# EAGLE board control_boardv7 (EAGLE 9.5.2)
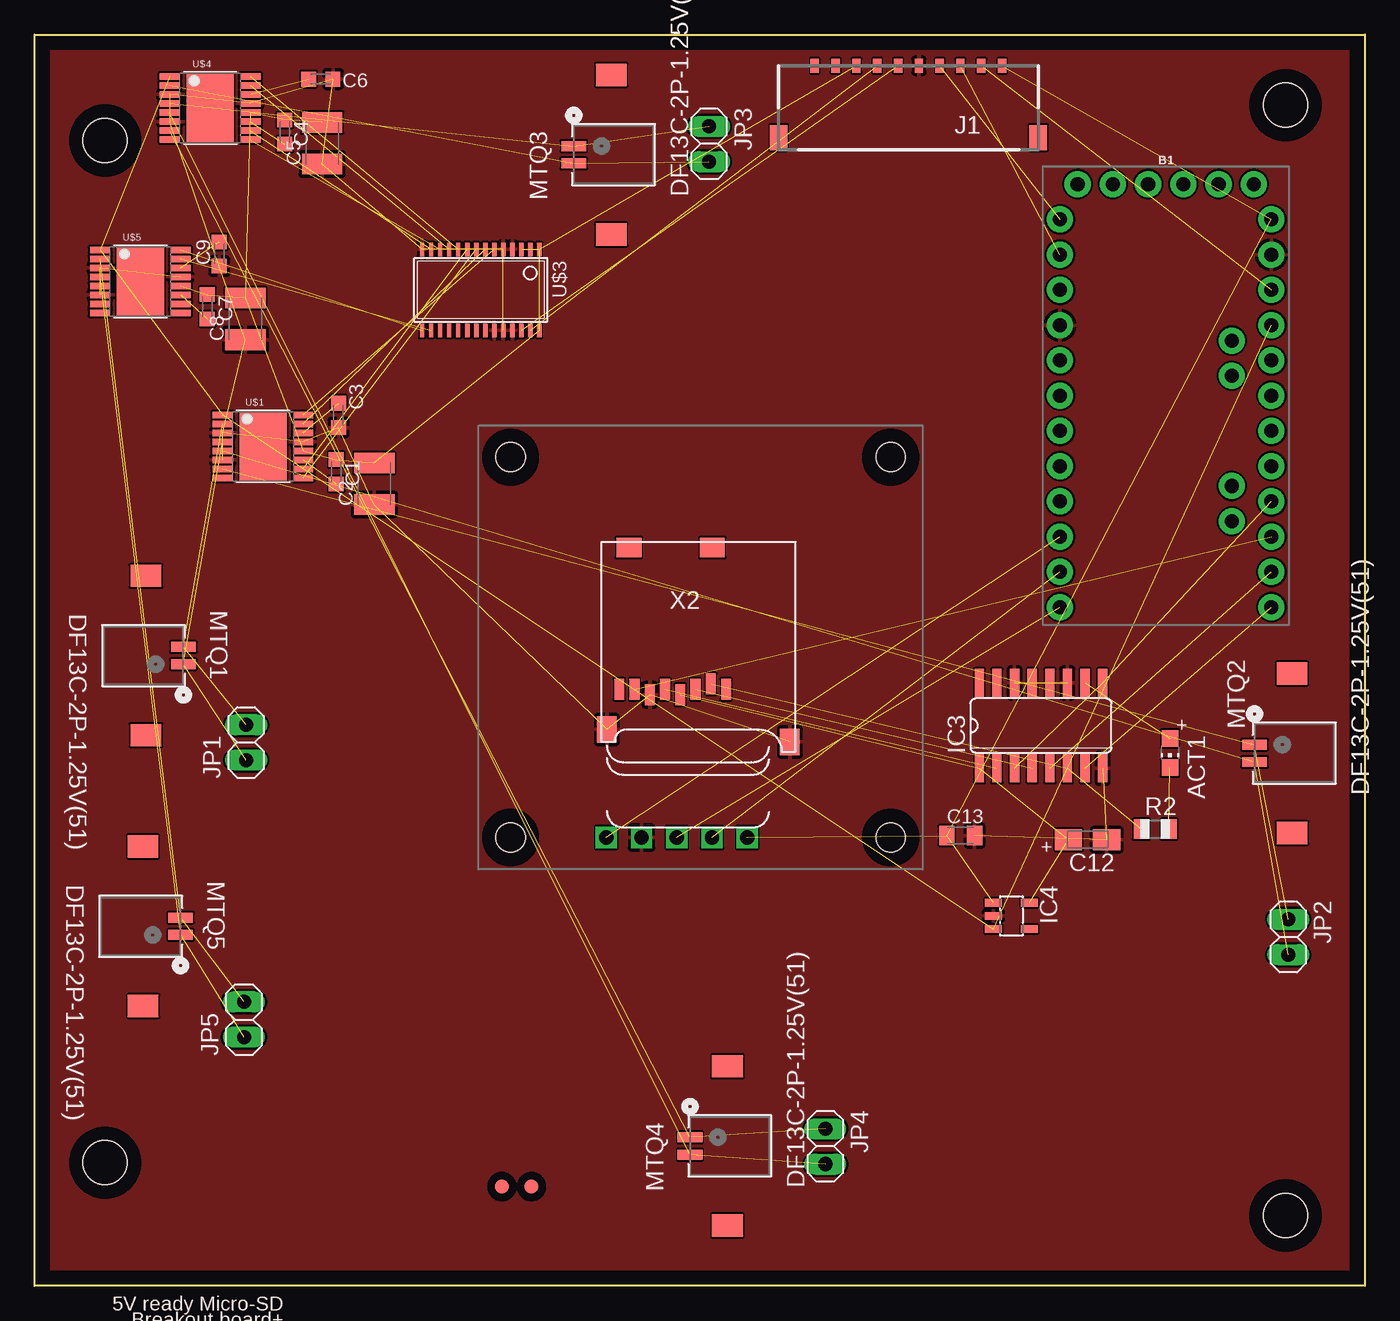
[diagram p0: board, top side]
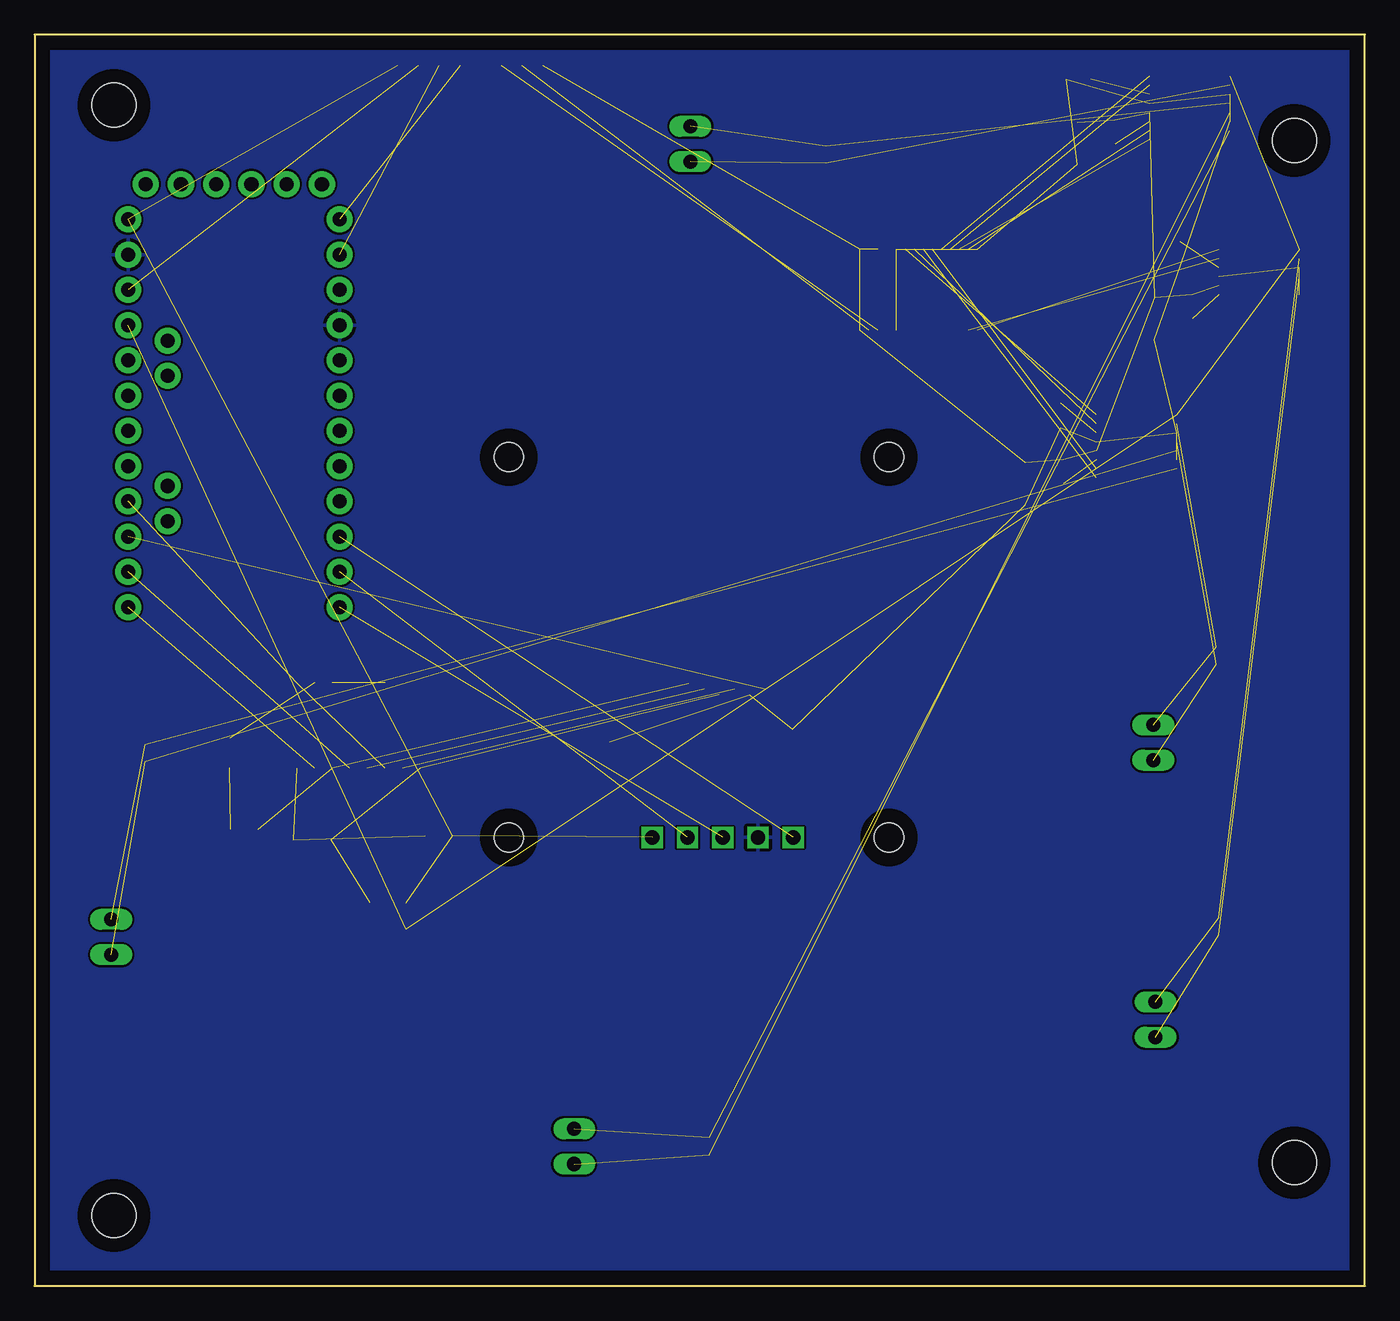
[diagram p1: board, bottom side, seen from below]

Size 95.89 x 90.17 mm. Coordinates in mm from the lower left corner, seen from the top.
Outline: 0,80 0,0
Outline: 0,0 0,90.17 95.89,90.17 95.89,0 0,0
Copper layers (1*16): Top 0.035mm / dielectric 1.5mm / Bottom 0.035mm
Design rules "default": minimum track width 6mil, minimum drill 0.35mm, track to track 6mil, track to pad 6mil, pad to pad 6mil, via to via 6mil, smd to smd 6mil, copper to edge 40mil, drill to drill 6mil, minimum pad ring 10mil, minimum via ring 8mil, stop-mask expansion 4mil, vias tented up to drill 0mil, thermal gap 10mil
Net classes: 0 default: width 0.152 mm; 1 New Class: width 0.457 mm; 2 MTQs: width 0.305 mm
Holes 3.17 mm at 5.08,82.55 5.08,8.89 90.17,5.08 90.17,85.09

## Footprints (pad centres in the part's own frame; a part is rotated, then mirrored left to right if it is on the bottom)
CHIP-LED0805 = smd 1.2 x 1.2: A 0,-1.05; C 0,1.05
ARDUINO_PRO_MINI = drill 1.016 pad 1.88: 1 -7.62,12.7; 2 -7.62,10.16; 3 -7.62,7.62; 4 -7.62,5.08; 5 -7.62,2.54; 6 -7.62,0; 7 -7.62,-2.54; 8 -7.62,-5.08; 9 -7.62,-7.62; 10 -7.62,-10.16; 11 -7.62,-12.7; 12 -7.62,-15.24; 13 7.62,-15.24; 14 7.62,-12.7; 15 7.62,-10.16; 16 7.62,-7.62; 17 7.62,-5.08; 18 7.62,-2.54; 19 7.62,0; 20 7.62,2.54; 21 7.62,5.08; 22 7.62,7.62; 23 7.62,10.16; 24 7.62,12.7; A4 4.763,1.429; A5 4.763,3.969; A6 4.763,-9.049; A7 4.763,-6.509; BLK -6.35,15.24; GND -3.81,15.24; GRN 6.35,15.24; RXI 1.27,15.24; TXO 3.81,15.24; VCC -1.27,15.24
C0603K = smd 1.05 x 1.08: 1 -0.875,0; 2 0.875,0
C1210K = smd 1.5 x 2.9: 1 -1.5,0; 2 1.5,0
A/3216-18R = smd 1.95 x 1.5: + 1.375,0; - -1.375,0
C0805K = smd 1.1 x 1.4: 1 -1,0; 2 1,0
SO16 = smd 0.66 x 2.032: 1 -4.445,-3.073; 2 -3.175,-3.073; 3 -1.905,-3.073; 4 -0.635,-3.073; 5 0.635,-3.073; 6 1.905,-3.073; 7 3.175,-3.073; 8 4.445,-3.073; 9 4.445,3.073; 10 3.175,3.073; 11 1.905,3.073; 12 0.635,3.073; 13 -0.635,3.073; 14 -1.905,3.073; 15 -3.175,3.073; 16 -4.445,3.073
SOT23-5L = smd 0.55 x 1.2: 1 -0.95,-1.3; 2 0,-1.3; 3 0.95,-1.3; 4 0.95,1.3; 5 -0.95,1.3
504050-1091 = smd 0.6 x 1: 1 -13.5,0; 2 -12,0; 3 -10.5,0; 4 -9,0; 5 -7.5,0; 6 -6,0; 7 -4.5,0; 8 -3,0; 9 -1.5,0; 10 0,0 | smd 1.25 x 1.8: 11 2.605,5.19; 12 -16.105,5.19
1X02 = drill 1.016 long: 1 -1.27,0; 2 1.27,0
CON2_1X2_U_DF13 = smd 0.711 x 1.778: 1 0,0; 2 -1.25,0 | smd 1.6 x 2.21: 3 -6.365,-2.7; 5 5.115,-2.7
R0805 = smd 1.1 x 1.4: 1 -1,0; 2 1,0
HTSSOP16 = smd 1.5 x 0.45: P1 -2.9,2.275; P2 -2.9,1.625; P3 -2.9,0.975; P4 -2.9,0.325; P5 -2.9,-0.325; P6 -2.9,-0.975; P7 -2.9,-1.625; P8 -2.9,-2.275; P9 2.9,-2.275; P10 2.9,-1.625; P11 2.9,-0.975; P12 2.9,-0.325; P13 2.9,0.325; P14 2.9,0.975; P15 2.9,1.625; P16 2.9,2.275 | smd 3.4 x 5: PAD 0,0
UCAM-III = drill 1.02 square: 1 19.36,2.3; 2 16.82,2.3; 3 14.28,2.3; 4 11.74,2.3; 5 9.2,2.3 | hole 2.1: 2.3,2.3; 29.7,2.3; 29.7,29.7; 2.3,29.7
TSSOP28 = smd 0.305 x 0.991: 1 -4.225,-2.918; 2 -3.575,-2.918; 3 -2.925,-2.918; 4 -2.275,-2.918; 5 -1.625,-2.918; 6 -0.975,-2.918; 7 -0.325,-2.918; 8 0.325,-2.918; 9 0.975,-2.918; 10 1.625,-2.918; 11 2.275,-2.918; 12 2.925,-2.918; 13 3.575,-2.918; 14 4.225,-2.918; 15 4.225,2.918; 16 3.575,2.918; 17 2.925,2.918; 18 2.275,2.918; 19 1.625,2.918; 20 0.975,2.918; 21 0.325,2.918; 22 -0.325,2.918; 23 -0.975,2.918; 24 -1.625,2.918; 25 -2.275,2.918; 26 -2.925,2.918; 27 -3.575,2.918; 28 -4.225,2.918
FIDUCIAL_1MM = smd 1 x 1: 1 0,0
MICROSD = smd 0.7 x 1.5: 1 9,-10.64; 2 7.9,-10.24; 3 6.8,-10.64; 4 5.7,-11.04; 5 4.6,-10.64; 6 3.5,-11.04; 7 2.4,-10.64; 8 1.3,-10.64 | smd 1.8 x 1.4: CD1 2,-0.44; CD2 8,-0.44 | smd 1.4 x 1.9: MT1 0.4,-13.54; MT2 13.6,-14.44

## Placement (x,y rotation side)
ACT1  RED  [CHIP-LED0805]  81.84,38.4 180 top
B1  ARDUINO_PRO_MINI  [ARDUINO_PRO_MINI]  81.53,64.16 0 top
C1  0.01uF  [C0603K]  21.74,58.67 270 top
C2  10uF  [C1210K]  24.49,57.81 90 top
C3  2.2uF  [C0603K]  21.89,62.74 90 top
C4  0.01uF  [C0603K]  18.03,83.16 270 top
C5  10uF  [C1210K]  20.73,82.35 90 top
C6  2.2uF  [C0603K]  20.62,86.97 180 top
C7  0.01uF  [C0603K]  12.45,70.56 270 top
C8  10uF  [C1210K]  15.19,69.7 90 top
C9  2.2uF  [C0603K]  13.31,74.37 90 top
C12  10uF/10V  [A/3216-18R]  75.9,32.16 180 top
C13  0.1uF  [C0805K]  66.75,32.46 0 top
IC3  4050D  [SO16]  72.54,40.39 0 top
IC4  LP298XS  [SOT23-5L]  70.41,26.67 270 top
J1  504050-1091  [504050-1091]  56.24,87.93 180 top
JP1  [1X02]  15.24,39.17 90 top
JP2  [1X02]  90.37,25.15 270 top
JP3  [1X02]  48.62,82.3 270 top
JP4  [1X02]  57,10.06 270 top
JP5  [1X02]  15.09,19.2 90 top
MTQ1  DF13C-2P-1.25V(51)  [CON2_1X2_U_DF13]  10.72,44.81 270 top
MTQ2  DF13C-2P-1.25V(51)  [CON2_1X2_U_DF13]  87.93,39.01 90 top
MTQ3  DF13C-2P-1.25V(51)  [CON2_1X2_U_DF13]  38.86,82.14 90 top
MTQ4  DF13C-2P-1.25V(51)  [CON2_1X2_U_DF13]  47.24,10.72 90 top
MTQ5  DF13C-2P-1.25V(51)  [CON2_1X2_U_DF13]  10.52,25.3 270 top
R2  1K  [R0805]  80.77,32.92 0 top
U$1  DRV8833PWP  [HTSSOP16]  16.46,60.5 0 top
U$2  UCAM-III  [UCAM-III]  32,30.02 0 top
U$3  PCA9685PW  [TSSOP28]  32.16,71.78 180 top
U$4  DRV8833PWP  [HTSSOP16]  12.65,84.89 0 top
U$5  DRV8833PWP  [HTSSOP16]  7.62,72.39 0 top
U$6  FIDUCIAL  [FIDUCIAL_1MM]  33.68,7.16 0 top
U$7  FIDUCIAL  [FIDUCIAL_1MM]  35.81,7.16 0 top
X2  MICROSD  [MICROSD]  40.84,53.64 0 top

## Library data of the parts
ACT1 C12 C13 IC4 R2 U$6 U$7 X2 = adafruit
B1 = SparkFun-Boards
C1-C9 = rcl; SPICEPREFIX: C
IC3 = 40xx
J1 = molex_10pin; DESCRIPTION: Pico-Lock SMT Wire-to-Board Header 10way Molex 504050 Series, 1.5mm Pitch 10 Way 1 Row Right Angle PCB Header, SMT Termination, 3A; HEIGHT: mm; MANUFACTURER_NAME: Molex; MANUFACTURER_PART_NUMBER: 504050-1091; MOUSER_PART_NUMBER: 538-504050-1091; MOUSER_PRICE-STOCK: https://www.mouser.com/Search/Refine.aspx?Keyword=538-504050-1091
JP1-JP5 = pinhead
MTQ1-MTQ5 = myparts; BUILT_BY: EMA_UL_Team; MANUFACTURER_PART_NUMBER: DF13C-2P-1.25V(51); VENDOR: Hirose
U$1-U$5 = myparts

## Nets
5V_1 [New Class]: C1.1 C2.2 C4.1 C5.2 C7.1 C8.2 J1.8 U$1.P12 U$3.1 U$3.2 U$3.3 U$3.28 U$4.P12 U$5.P12
5V_2 [New Class]: B1.24 C13.1 IC4.1 J1.1 U$2.1
+3V3: C12.+ IC3.1 IC4.5 X2.4
CD: X2.CD1
CLK: B1.16 IC3.3 IC3.9
CS: B1.13 IC3.7
DI: B1.14 IC3.5
DO: B1.15 X2.7
GND [New Class]: B1.4 B1.23 C2.1 C3.1 C5.1 C6.1 C8.1 C9.1 C12.- C13.2 IC3.8 IC3.11 IC3.14 IC4.2 J1.5 U$1.P3 U$1.P6 U$1.P13 U$2.4 U$3.4 U$3.5 U$3.14 U$3.23 U$3.24 U$3.25 U$4.P3 U$4.P6 U$4.P13 U$5.P3 U$5.P6 U$5.P13 X2.6 X2.MT1 X2.MT2
MTQ1_A: U$1.P16 U$3.6
MTQ1_B: U$1.P15 U$3.7
MTQ2_A: U$1.P9 U$3.8
MTQ2_B: U$1.P10 U$3.9
MTQ3_A: U$3.10 U$4.P16
MTQ3_B: U$3.11 U$4.P15
MTQ4_A: U$3.12 U$4.P9
MTQ4_B: U$3.13 U$4.P10
MTQ5_A: U$3.15 U$5.P16
MTQ5_B: U$3.16 U$5.P15
N$1 [MTQs]: JP3.2 MTQ3.2 U$4.P2
N$2: C3.2 U$1.P14
N$3 [MTQs]: JP1.1 MTQ1.1 U$1.P4
N$4 [MTQs]: JP1.2 MTQ1.2 U$1.P2
N$5 [MTQs]: JP2.1 MTQ2.1 U$1.P7
N$6 [MTQs]: JP2.2 MTQ2.2 U$1.P5
N$7: C1.2 U$1.P11
N$8 [MTQs]: JP4.1 MTQ4.1 U$4.P7
N$9 [MTQs]: JP4.2 MTQ4.2 U$4.P5
N$10: C6.2 U$4.P14
N$11: C4.2 U$4.P11
N$12 [MTQs]: JP3.1 MTQ3.1 U$4.P4
N$13 [MTQs]: JP5.2 MTQ5.2 U$5.P2
N$14 [New Class]: U$1.PAD
N$15 [New Class]: U$4.PAD
N$16: C9.2 U$5.P14
N$17: C7.2 U$5.P11
N$18 [MTQs]: JP5.1 MTQ5.1 U$5.P4
N$19 [New Class]: U$5.PAD
N$22: ACT1.A IC3.10
N$23: IC3.2 X2.5
N$24: IC3.6 R2.1 X2.2
N$25: ACT1.C R2.2
N$26: IC3.4 X2.3
N$27: B1.10 U$2.5
RST: B1.22 J1.2
RX: B1.12 U$2.3
RXI: B1.2 J1.3
SCL: J1.6 U$3.26
SDA: J1.7 U$3.27
TX: B1.11 U$2.2
TXO: B1.1 J1.4
VCC: B1.21 IC4.3 U$1.P1 U$4.P1 U$5.P1

## Tracks (layer width: path | path; a pad name or v marks a point on that pad's centre or on a via)
5V_1  (13 unrouted)
5V_2  (4 unrouted)
+3V3  (3 unrouted)
CLK  (2 unrouted)
CS  (1 unrouted)
DI  (1 unrouted)
DO  (1 unrouted)
GND  (22 unrouted)
  pour Top: -3.2,95.25 99.36,95.25 105.46,89.15 105.46,6.4 96.01,-3.05 -1.07,-3.05 -4.11,0 -4.11,94.34
  pour Bottom: -2.59,93.73 95.71,93.73 100.58,88.85 101.35,88.09 101.35,-12.34 -5.94,-12.34 -8.53,-9.75 -8.53,87.78
MTQ1_A  (1 unrouted)
MTQ1_B  (1 unrouted)
MTQ2_A  (1 unrouted)
MTQ2_B  (1 unrouted)
MTQ3_A  (1 unrouted)
MTQ3_B  (1 unrouted)
MTQ4_A  (1 unrouted)
MTQ4_B  (1 unrouted)
MTQ5_A  (1 unrouted)
MTQ5_B  (1 unrouted)
N$1  (2 unrouted)
N$2  (1 unrouted)
N$3  (2 unrouted)
N$4  (2 unrouted)
N$5  (2 unrouted)
N$6  (2 unrouted)
N$7  (1 unrouted)
N$8  (2 unrouted)
N$9  (2 unrouted)
N$10  (1 unrouted)
N$11  (1 unrouted)
N$12  (2 unrouted)
N$13  (2 unrouted)
N$16  (1 unrouted)
N$17  (1 unrouted)
N$18  (2 unrouted)
N$22  (1 unrouted)
N$23  (1 unrouted)
N$24  (2 unrouted)
N$25  (1 unrouted)
N$26  (1 unrouted)
N$27  (1 unrouted)
RST  (1 unrouted)
RX  (1 unrouted)
RXI  (1 unrouted)
SCL  (1 unrouted)
SDA  (1 unrouted)
TX  (1 unrouted)
TXO  (1 unrouted)
VCC  (4 unrouted)

## Text on the board
tPlace: 5V ready Micro-SD | Breakout board+ | adafruit.com